# Altium PCB MCD V1.00 R.00.PcbDoc (part 1 of 3)
Units mm, origin at the board's own origin, x right, y up, seen from the top; angles counter-clockwise.
Board outline 257.5 x 162.5 mm, 2 copper layers (Top Layer, Bottom Layer); 260 components, 165 nets, 831 pads, 233 vias.
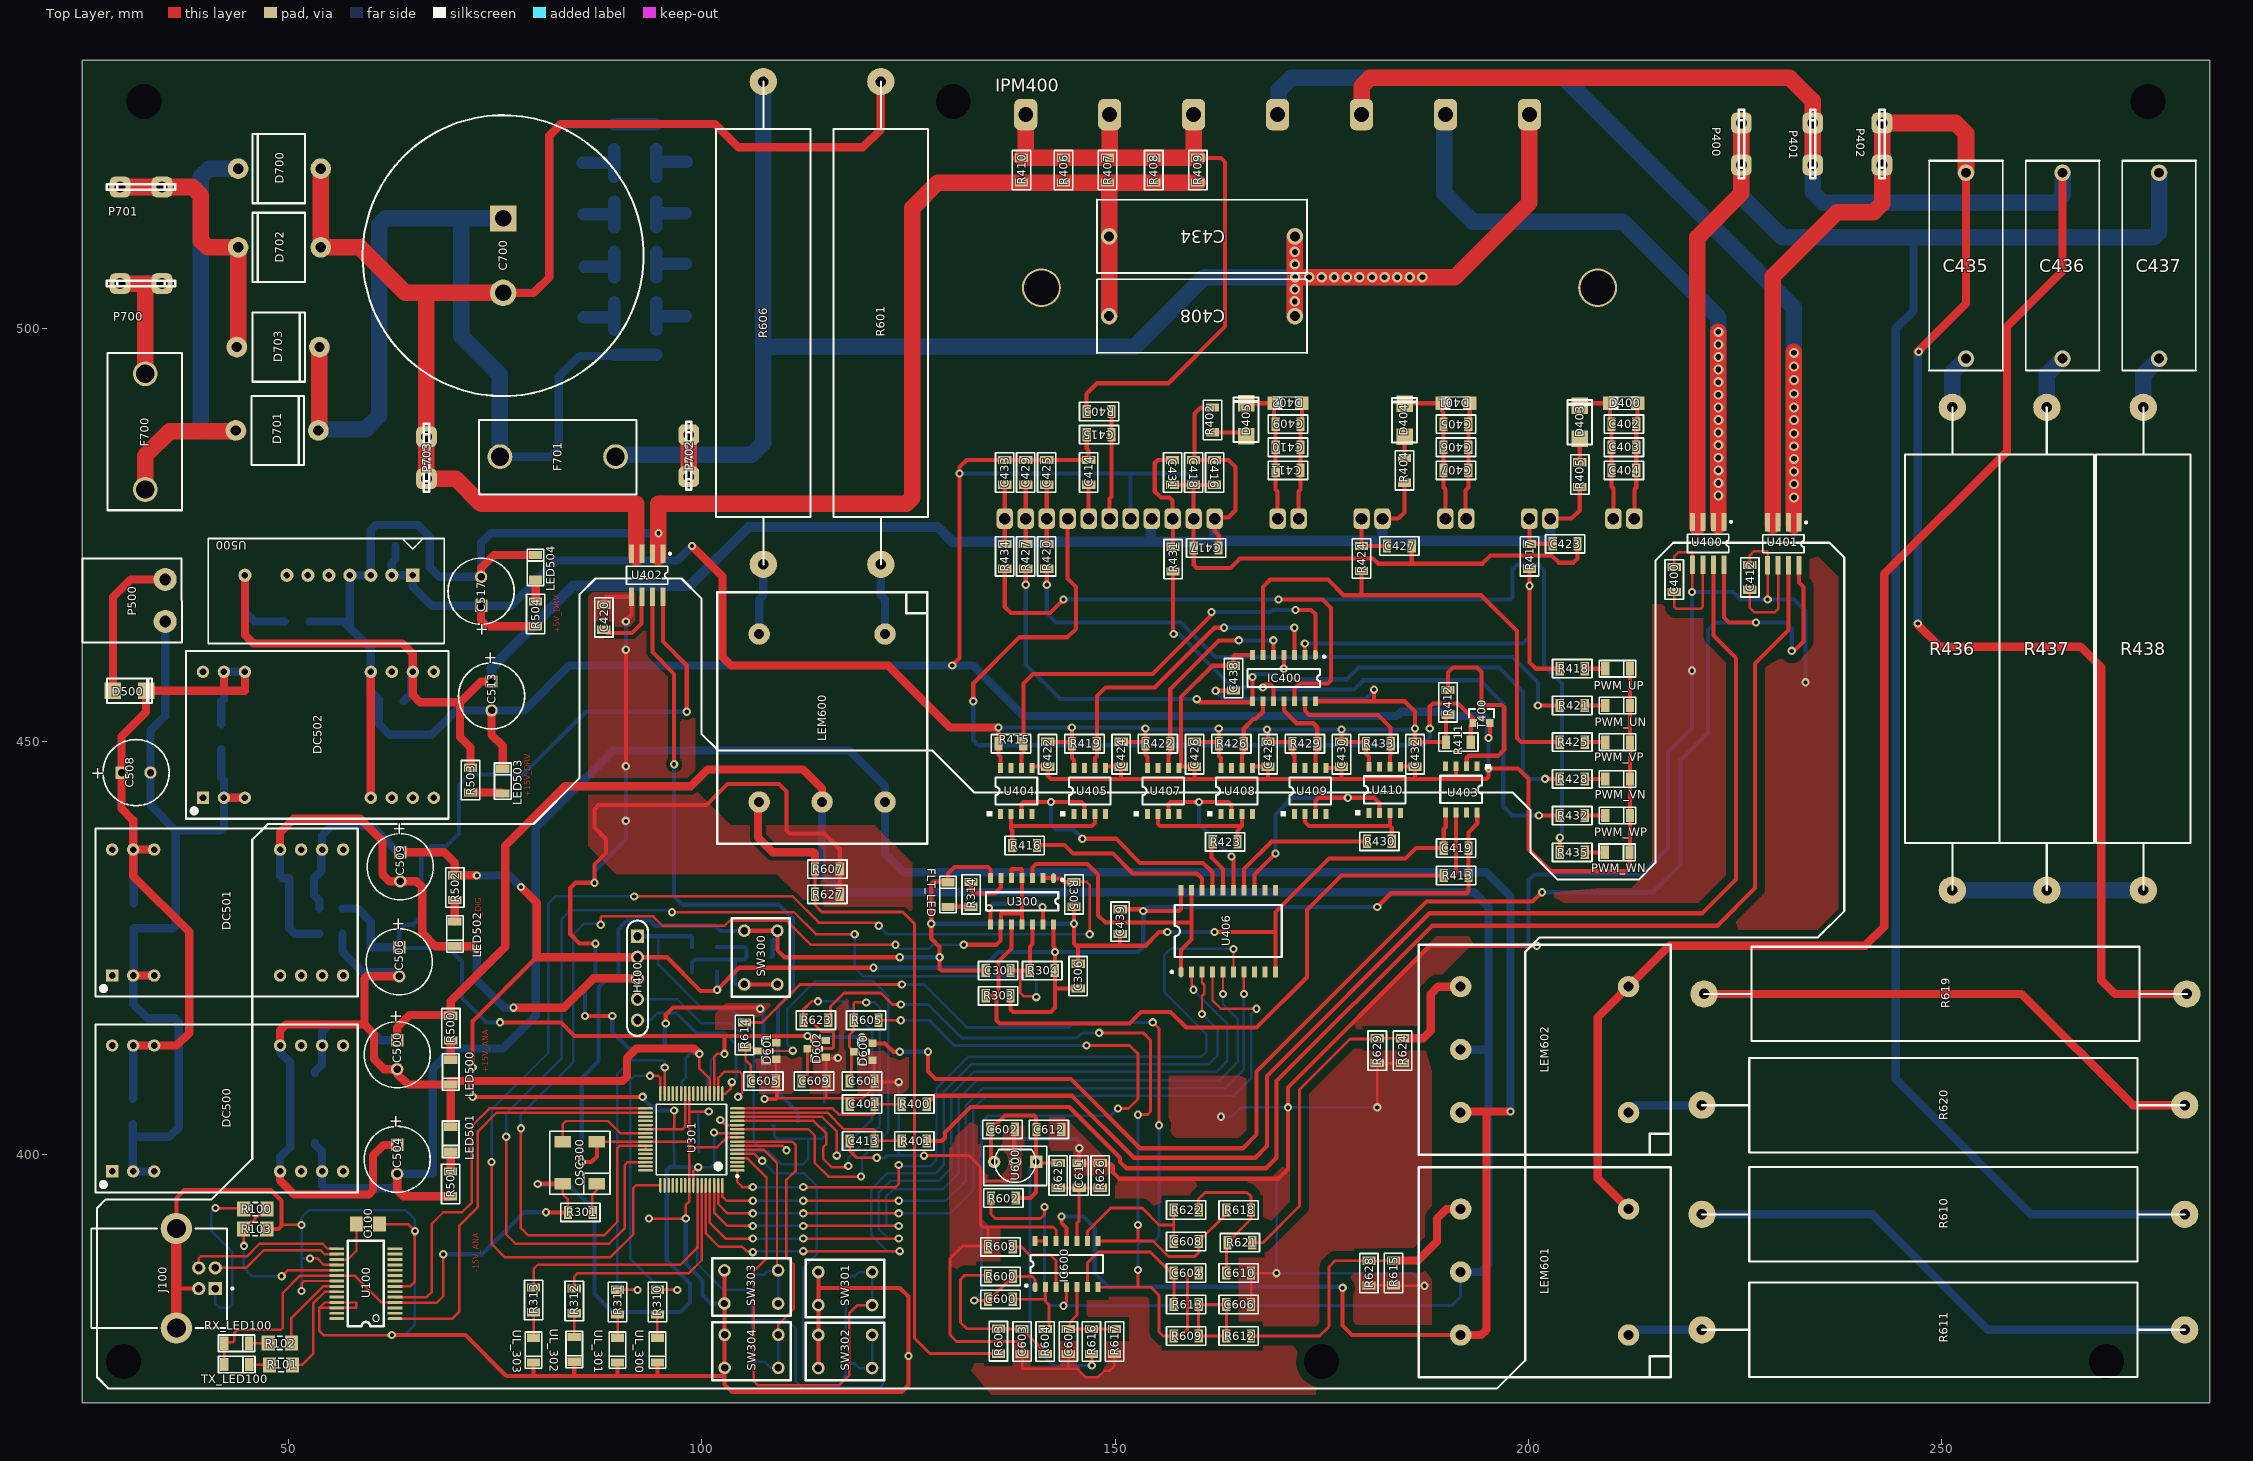
[diagram p0: Top Layer view]
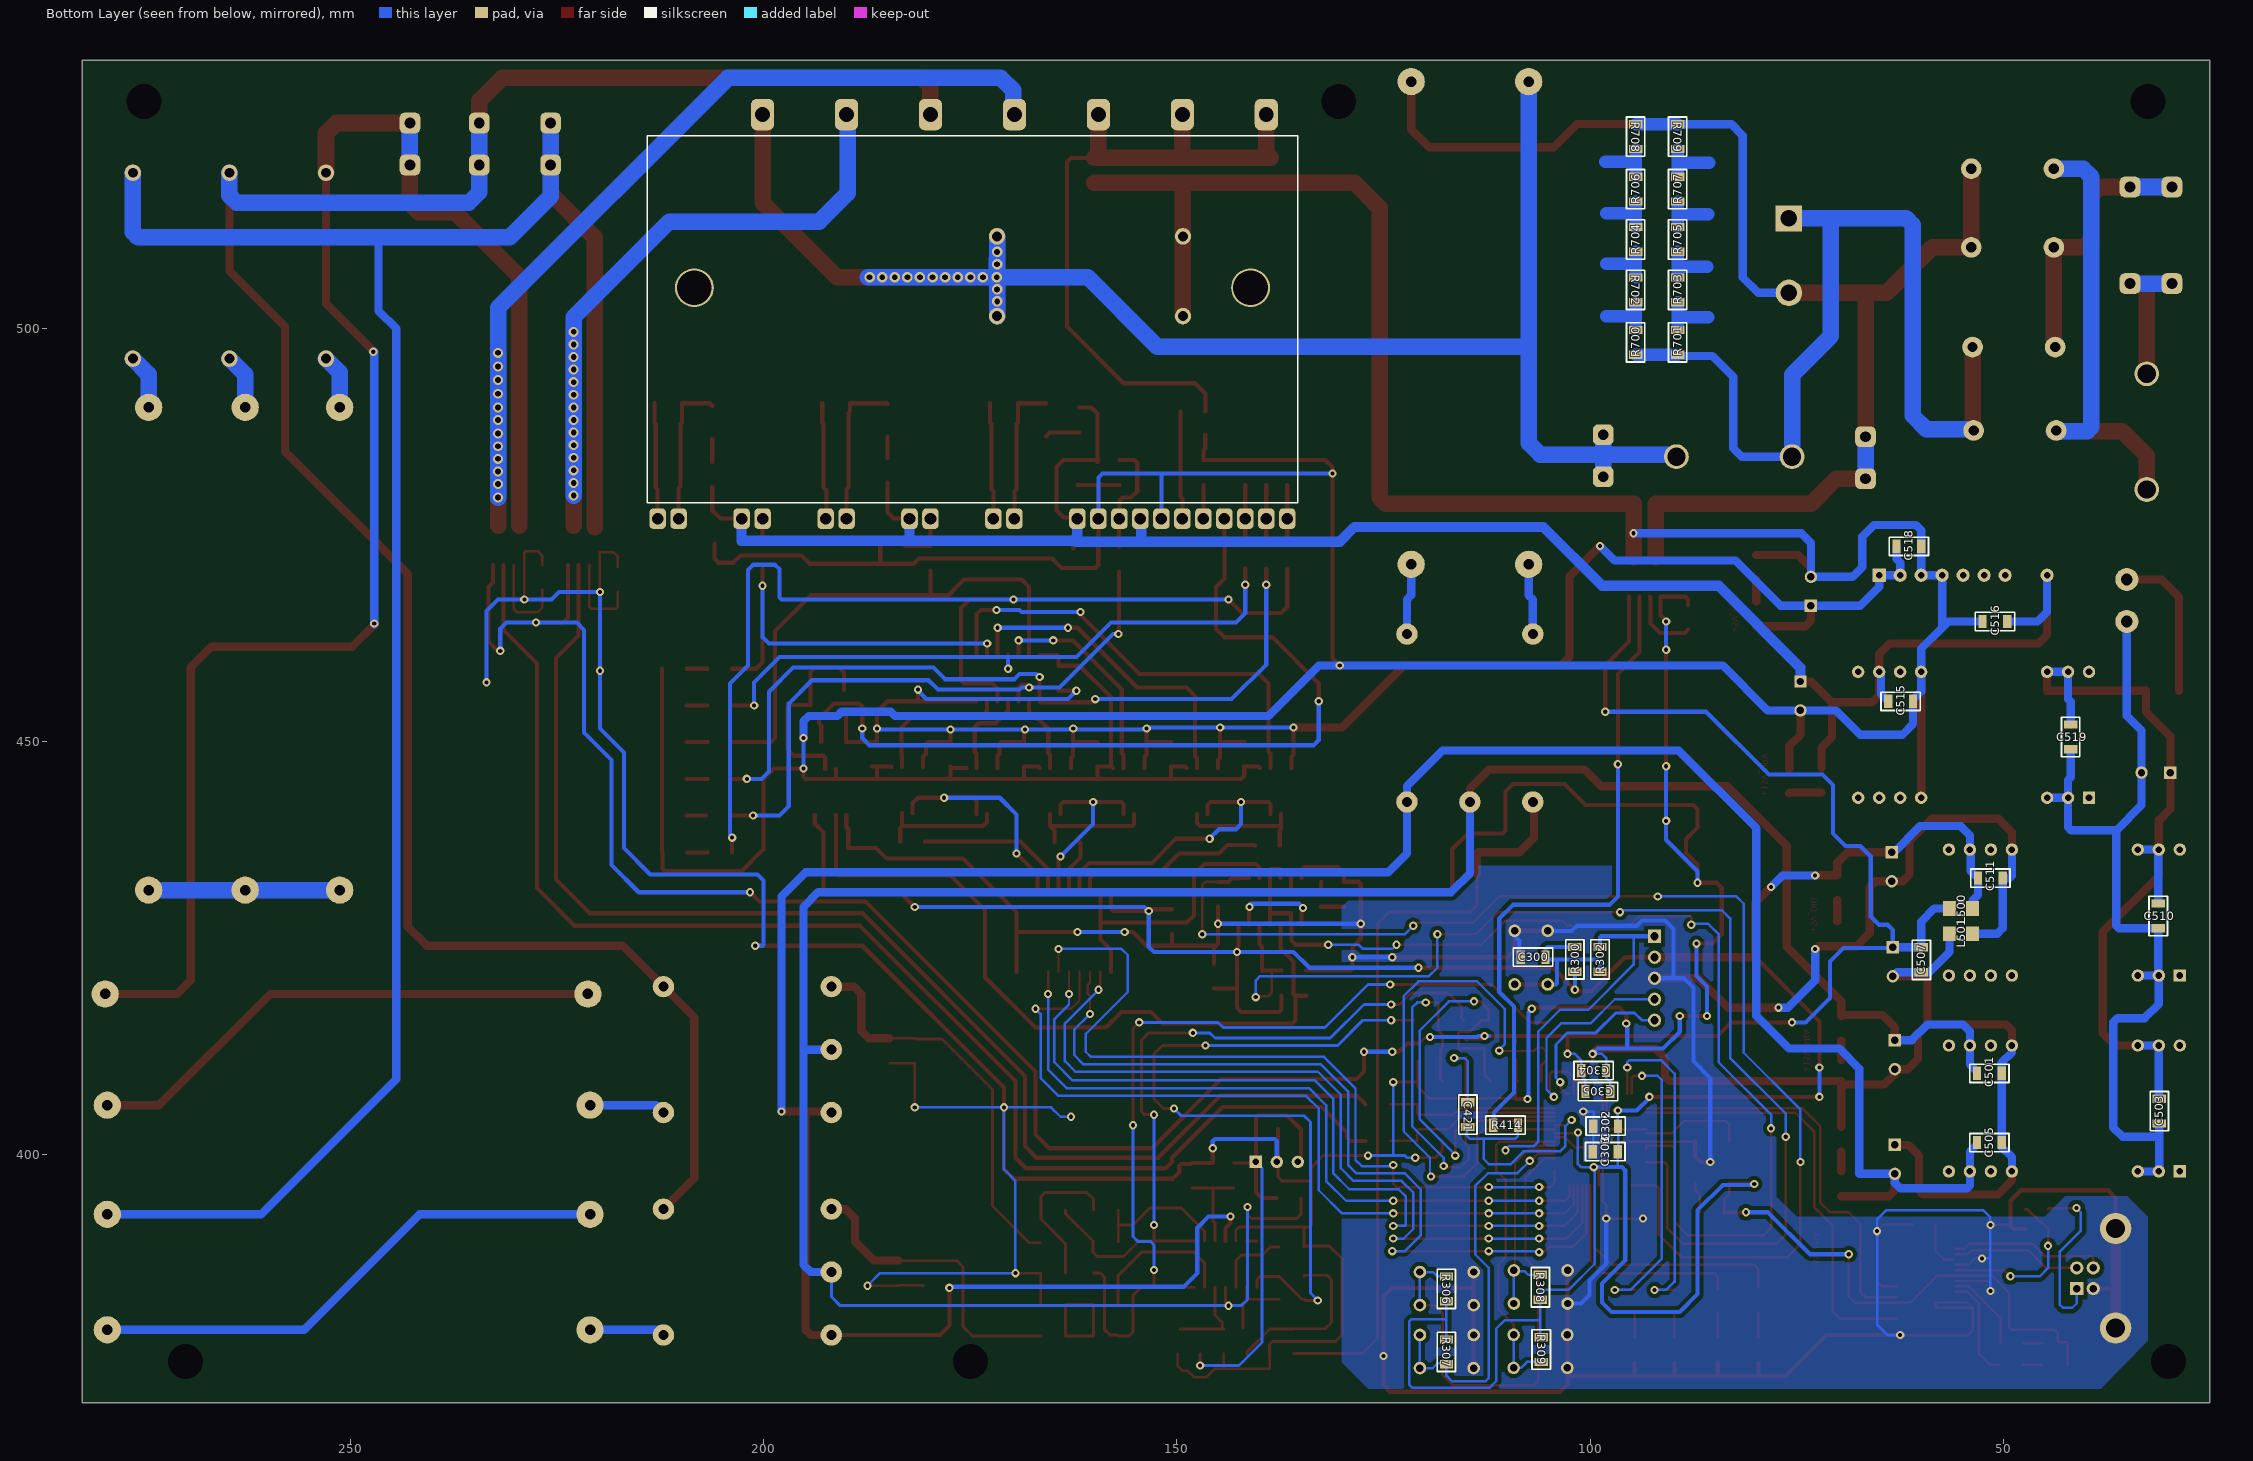
[diagram p1: Bottom Layer view, seen from below]

## Layer stack, top to bottom
Top Layer: signal copper 0.0356
Dielectric: dielectric 0.32, FR-4, Dk 4.8
Bottom Layer: signal copper 0.0356

## Board outline
282.5,370 25,370 25,532.5 282.5,532.5 282.5,370

## Design rules (kind name [scope] priority, off if disabled: settings)
Clearance Clearance_3 [InNamedPolygon('GND_DIG_POLY') vs Not(InNet(GND_DIG)) And  All] p1: gap=0.5
Clearance Clearance_2 [InNamedPolygon('GND_ANA_POLY_2') vs Not (InNet(GND_ANA)) And All] p2: gap=0.5
Clearance Clearance_1 [InNamedPolygon('GND_ANA_POUR') vs Not (InNet('GND_ANA')) And All] p3: gap=1
ComponentClearance [All] p1 off: gap=0 collisioncheckmode=3 verticalgap=0.254 showdistances=TRUE
HoleSize [All] p1: absolutevalues=TRUE maxlimit=5 minlimit=0.45 maxpercent=80.000 minpercent=20.000
PlaneConnect [All] p1: planeconnectstyle=Direct reliefexpansion=0.508 reliefentries=4 reliefconductorwidth=0.254 reliefairgap=0.254
PolygonConnect PolygonConnect_2 [All vs IsNamedPolygon('GND_ANA_POLY_2')] p1: connectstyle=Relief reliefconductorwidth=0.5 reliefentries=4 polygonreliefangle="90 Angle"
PolygonConnect PolygonConnect_1 [All vs IsNamedPolygon('GND_DIG_POLY') Or  IsNamedPolygon('GND_ANA_POLY')] p2: connectstyle=Direct reliefconductorwidth=0.5 reliefentries=4 polygonreliefangle="90 Angle"
PolygonConnect [All] p3: connectstyle=Direct reliefconductorwidth=0.5 reliefentries=4 polygonreliefangle="90 Angle"
RoutingVias [All] p1: holewidth=0.5 width=1 viastyle="Through Hole" minholewidth=0.4 minwidth=1 maxholewidth=1 maxwidth=3
SilkToSilkClearance [All] p1: silktosilkclearance=0
SilkscreenOverComponentPads [All] p1: minsilkscreentomaskgap=0.254
SolderMaskExpansion [All] p1: expansion=0.1
TestPointUsage [All] p1: valid=0 allowmultiple=FALSE
Testpoint [All] p1: side=15 testpointundercomponent=TRUE minsize=1.016 maxsize=2.54 preferedsize=1.524 minholesize=0 maxholesize=1.016 preferedholesize=0.813 testpointgrid=0.025 style=1023 order=0123456789
UnConnectedPin [Not All] p1:
Width [All] p1: maxlimit=4 minlimit=0.3 preferedwidth=0.5
19 further rules are at their usual default settings.

## Classes and differential pairs
component class VM: C600 C601 C602 C603 C604 C605 C606 C607 C608 C609 C610 C611 D600 D601 D602 IC600 LEM600 LEM601 LEM602 R600 R601 R602 R603 R604 R605 R606 R607 R608 R609 R610 R611 R612 R613 R614 R615 R616 R617 R618 R619 R620 R621 R622 R623 R624 R625 R626 R627 R628 R629 U600
component class REC: C700 D700 D701 D702 D703 F700 F701 P700 P701 P702 P703 R700 R701 R702 R703 R704 R705 R706 R707 R708 R709
component class PSU: C500 C501 C503 C504 C505 C506 C507 C508 C509 C510 C511 C513 C515 C516 C517 C518 C519 D500 DC500 DC501 DC502 L500 L501 LED500 LED501 LED502 LED503 LED504 P500 R500 R501 R502 R503 R504 U500
component class PB: C400 C401 C402 C403 C404 C405 C406 C407 C408 C409 C410 C411 C412 C413 C414 C415 C416 C417 C418 C419 C420 C421 C422 C423 C424 C425 C426 C427 C428 C429 C430 C431 C432 C433 C434 C435 C436 C437 C438 C439 D400 D401 D402 D403 D404 D405 IC400 IPM400 P400 P401 P402 PWM_UN PWM_UP PWM_VN PWM_VP PWM_WN PWM_WP R400 R401 R402 R403 R404 R405 R406 R407 R408 R409 R410 R411 R412 R413 R414 R415 R416 R417 R418 R419 R420 R421 R422 R423 R424 R425 R426 R427 R428 R429 R430 R431 R432 R433 R434 R435 R436 R437 R438 T400 U400 U401 U402 U403 U404 U405 U406 U407 U408 U409 U410
component class MCU: C300 C301 C302 C303 C304 C305 C306 FLT_LED H400 OSC300 R300 R301 R302 R303 R304 R305 R306 R307 R308 R309 R310 R311 R312 R313 R314 SW300 SW301 SW302 SW303 SW304 U300 U301 UL_300 UL_301 UL_302 UL_303
component class COM: C100 J100 R100 R101 R102 R103 RX_LED100 TX_LED100 U100

## Components (designator, comment, footprint, x,y, rotation, side; value= is the part's Value field where it differs from the comment)
C100 "Cap" 3216[1206] 59.606,391.637 r180 top
C300 "Cap 1206" 1206_REFLOW 106.913,423.938 r180 bottom
C301 "Cap 1206" 1206_REFLOW 135.86,422.313 r0 top
C302 "Cap 1206" 1206_REFLOW 98.125,403.485 r180 bottom
C303 "Cap 1206" 1206_REFLOW 98.171,400.399 r180 bottom
C304 "Cap 1206" 1206_REFLOW 99.568,410.21 r0 bottom
C305 "Cap 1206" 1206_REFLOW 99.06,407.67 r0 bottom
C306 "Cap 1206" 1206_REFLOW 145.542,421.64 r270 top
C400 "Cap 1206" 1206_REFLOW 217.678,469.646 r270 top
C401 "Cap 1206" 1206_REFLOW 119.404,406.146 r0 top
C402 "Cap 1206" 1206_REFLOW 211.582,488.442 r180 top
C403 "Cap 1206" 1206_REFLOW 211.582,485.648 r180 top
C404 "Cap 1206" 1206_REFLOW 211.582,482.854 r180 top
C405 "Cap 1206" 1206_REFLOW 191.262,488.442 r180 top
C406 "Cap 1206" 1206_REFLOW 191.262,485.648 r180 top
C407 "Cap 1206" 1206_REFLOW 191.262,482.854 r180 top
C408 "Cap" CAP26X19P22_5H 160.528,501.523 r0 top
C409 "Cap 1206" 1206_REFLOW 170.942,488.442 r180 top
C410 "Cap 1206" 1206_REFLOW 170.942,485.648 r180 top
C411 "Cap 1206" 1206_REFLOW 170.942,482.854 r180 top
C412 "Cap 1206" 1206_REFLOW 226.822,469.9 r270 top
C413 "Cap 1206" 1206_REFLOW 119.404,401.701 r0 top
C414 "Cap 1206" 1206_REFLOW 146.812,482.6 r270 top
C415 "Cap 1206" 1206_REFLOW 148.082,487.172 r0 top
C416 "Cap 1206" 1206_REFLOW 162.052,482.6 r90 top
C417 "Cap 1206" 1206_REFLOW 161.036,473.456 r0 top
C418 "Cap 1206" 1206_REFLOW 159.512,482.6 r90 top
C419 "Cap 1206" 1206_REFLOW 191.286,437.134 r0 top
C420 "Cap 1206" 1206_REFLOW 88.138,465.074 r270 top
C421 "Cap 1206" 1206_REFLOW 114.808,404.876 r270 bottom
C422 "Cap 1206" 1206_REFLOW 141.855,448.498 r90 top
C423 "Cap 1206" 1206_REFLOW 204.47,473.964 r180 top
C424 "Cap 1206" 1206_REFLOW 150.745,448.498 r90 top
C425 "Cap 1206" 1206_REFLOW 141.732,482.6 r270 top
C426 "Cap 1206" 1206_REFLOW 159.635,448.498 r90 top
C427 "Cap 1206" 1206_REFLOW 184.404,473.71 r180 top
C428 "Cap 1206" 1206_REFLOW 168.525,448.498 r90 top
C429 "Cap 1206" 1206_REFLOW 139.192,482.6 r270 top
C430 "Cap 1206" 1206_REFLOW 177.415,448.498 r90 top
C431 "Cap 1206" 1206_REFLOW 156.972,482.6 r90 top
C432 "Cap 1206" 1206_REFLOW 186.305,448.498 r90 top
C433 "Cap 1206" 1206_REFLOW 136.652,482.6 r270 top
C434 "Cap" CAP26X19P22_5H 160.528,511.175 r0 top
C435 "Cap" CAP26X19P22_5H 252.984,507.619 r90 top
C436 "Cap" CAP26X19P22_5H 264.668,507.619 r90 top
C437 "Cap" CAP26X19P22_5H 276.352,507.619 r90 top
C438 "Cap 1206" 1206_REFLOW 164.338,457.708 r270 top
C439 "Cap 1206" 1206_REFLOW 150.622,428.244 r90 top
C500 "Cap" CAPPR3.5-8x12 63.124,412.14 r270 top
C501 "Cap 1206" 1206_REFLOW 51.694,409.882 r0 bottom
C503 "Cap 1206" 1206_REFLOW 31.12,405.31 r90 bottom
C504 "Cap" CAPPR3.5-8x12 63.124,399.468 r270 top
C505 "Cap 1206" 1206_REFLOW 51.694,401.5 r180 bottom
C506 "Cap" CAPPR3.5-8x12 63.378,423.372 r270 top
C507 "Cap 1206" 1206_REFLOW 59.925,423.625 r90 bottom
C508 "Cap" CAPPR3.5-8x12 31.524,446.278 r0 top
C509 "Cap" CAPPR3.5-8x12 63.5,434.876 r270 top
C510 "Cap 1206" 1206_REFLOW 31.247,428.932 r90 bottom
C511 "Cap 1206" 1206_REFLOW 51.567,433.504 r0 bottom
C513 "Cap" CAPPR3.5-8x12 74.549,455.549 r270 top
C515 "Cap 1206" 1206_REFLOW 62.421,454.906 r0 bottom
C516 "Cap 1206" 1206_REFLOW 51.011,464.551 r180 bottom
C517 "Cap" CAPPR3.5-8x12 73.279,468.221 r90 top
C518 "Cap 1206" 1206_REFLOW 61.425,473.656 r0 bottom
C519 "Cap 1206" 1206_REFLOW 41.847,450.588 r90 bottom
C600 "Cap 1206" 1206_REFLOW 136.14,382.537 r180 top
C601 "Cap 1206" 1206_REFLOW 119.38,408.94 r180 top
C602 "Cap 1206" 1206_REFLOW 136.394,403.111 r180 top
C603 "Cap 1206" 1206_REFLOW 138.759,377.43 r90 top
C604 "Cap 1206" 1206_REFLOW 158.619,385.712 r0 top
C605 "Cap 1206" 1206_REFLOW 107.442,408.94 r180 top
C606 "Cap 1206" 1206_REFLOW 164.969,381.902 r180 top
C607 "Cap 1206" 1206_REFLOW 144.347,377.43 r90 top
C608 "Cap 1206" 1206_REFLOW 158.619,389.522 r0 top
C609 "Cap 1206" 1206_REFLOW 113.562,408.94 r180 top
C610 "Cap 1206" 1206_REFLOW 164.969,385.712 r180 top
C611 "Cap 1206" 1206_REFLOW 145.665,397.523 r270 top
C612 "Cap 1206" 1206_REFLOW 141.986,403.098 r180 top
C700 "Cap" "CAPR 52X35" 75.946,513.334 r270 top
D400 "BZV55CXXX" D_MINIMELF_BZV55C5V1(Primary) 211.582,490.982 r180 top
D401 "BZV55CXXX" D_MINIMELF_BZV55C5V1(Primary) 191.262,490.982 r180 top
D402 "BZV55CXXX" D_MINIMELF_BZV55C5V1(Primary) 170.942,490.982 r180 top
D403 "US1M" DO-214_S1A(Primary) 206.248,488.664 r90 top
D404 "S1A" DO-214_S1A(Primary) 185.039,488.918 r90 top
D405 "S1A" DO-214_S1A(Primary) 165.862,488.982 r90 top
D500 "1N5819" DO-214_S1A(Primary) 30.734,456.184 r0 top
D600 "BAT64-04" SOT23_HIS_Primary 120.65,411.48 r90 top
D601 "BAT64-04" SOT23_HIS_Primary 109.017,411.569 r90 top
D602 "BAT64-04" SOT23_HIS_Primary 114.986,411.823 r90 top
D700 "P 1000S" "P 1000 S" 53.879,519.363 r180 top
D701 "P 1000S" "P 1000 S" 43.594,487.68 r0 top
D702 "P 1000S" "P 1000 S" 53.879,509.838 r180 top
D703 "P 1000S" "P 1000 S" 43.719,497.773 r0 top
DC500 "TEN 5-2423" DIP24_TRACO 28.679,398.13 r90 top
DC501 "EC3A21HM" DIP24_TRACO 28.679,421.84 r90 top
DC502 "TEN 5-2423" DIP24_TRACO 39.664,443.35 r90 top
F700 "Fuse Holder PCB P15mm" "Fuse Holder PCB P15mm" 32.766,494.538 r270 top
F701 "Fuse Holder PCB P15mm" "Fuse Holder PCB P15mm" 75.565,484.632 r0 top
FLT_LED "RED LED" LED_1206 128.508,429.05 r90 top
H400 "HEADER X5" SIP5 92.202,426.466 r270 top
IC400 "SN74HC14D" SO14_HIS 174.244,460.314 r270 top
IC600 "LM837" SO14 140.335,383.999 r90 top
IPM400 "Component_1" PS22054 212.852,477.012 r180 top locked
J100 "1-1470156-1" USB2.5-2H4D 40.116,385.084 r180 top
L500 "RES" 3216[1206] 55.123,429.821 r0 bottom
L501 "RES" 3216[1206] 55.123,426.773 r0 bottom
LED500 "Green Led" LED_1206 70.903,412.505 r270 top
LED501 "Green Led" LED_1206 70.903,404.377 r270 top
LED502 "Green Led" LED_1206 71.395,429.221 r270 top
LED503 "Green Led" LED_1206 74.628,442.766 r90 top
LED504 "Green Led" LED_1206 78.597,468.643 r90 top
LEM600 "LEM" LV25 122.174,463.042 r0 top
LEM601 "LEM" LV25 212.149,378.211 r270 top
LEM602 "LEM" LV25 212.149,405.135 r270 top
OSC300 "ESC-3951M-80-BN" OSC7X5 85.072,399.067 r90 top
P400 "FASTON 6.3MM" "FASTON 6.3mm" 225.806,522.478 r270 top
P401 "FASTON 6.3MM" "FASTON 6.3mm" 234.442,522.478 r270 top
P402 "FASTON 6.3MM" "FASTON 6.3mm" 242.824,522.224 r90 top
P500 "MSTBA 2,5/ 2-G-5,08" MSTB2.5/2-G-5.08 35.052,469.646 r0 top
P700 "FASTON 6.3MM" "FASTON 6.3mm" 32.258,505.46 r180 top
P701 "FASTON 6.3MM" "FASTON 6.3mm" 32.258,517.144 r180 top
P702 "FASTON 6.3MM" "FASTON 6.3mm" 98.425,484.505 r90 top
P703 "FASTON 6.3MM" "FASTON 6.3mm" 66.675,484.505 r270 top
PWM_UN "LED" LED_1206 208.348,455.692 r0 top
PWM_UP "LED" LED_1206 208.348,460.137 r0 top
PWM_VN "LED" LED_1206 208.348,446.802 r0 top
PWM_VP "LED" LED_1206 208.348,451.247 r0 top
PWM_WN "LED" LED_1206 208.3,437.912 r0 top
PWM_WP "LED" LED_1206 208.348,442.357 r0 top
R100 "Resistor" 3216[1206] 45.974,393.446 r180 top
R101 "Resistor" 3216[1206] 49.065,374.587 r180 top
R102 "Resistor" 3216[1206] 48.938,377.254 r180 top
R103 "Resistor" 3216[1206] 45.939,391.04 r180 top
R300 "RES" 1206_REFLOW 101.854,423.672 r90 bottom
R301 "RES" 1206_REFLOW 85.293,393.053 r0 top
R302 "RES" 1206_REFLOW 98.806,423.672 r90 bottom
R303 "RES" 1206_REFLOW 135.86,419.265 r180 top
R304 "RES" 1206_REFLOW 141.194,422.313 r180 top
R305 "RES" 1206_REFLOW 145.034,431.546 r270 top
R306 "RES" 1206_REFLOW 117.399,383.804 r90 bottom
R307 "RES" 1206_REFLOW 117.399,376.184 r270 bottom
R308 "RES" 1206_REFLOW 106.032,383.994 r90 bottom
R309 "RES" 1206_REFLOW 105.918,376.452 r270 bottom
R310 "RES" 1206_REFLOW 94.624,382.206 r90 top
R311 "RES" 1206_REFLOW 89.798,382.206 r90 top
R312 "RES" 1206_REFLOW 84.559,382.333 r90 top
R313 "RES" 1206_REFLOW 79.638,382.46 r90 top
R314 "RES" 1206_REFLOW 132.588,431.546 r90 top
R400 "RES" 1206_REFLOW 125.706,406.146 r180 top
R401 "RES" 1206_REFLOW 125.706,401.701 r180 top
R402 "RES" 1206_REFLOW 161.798,488.95 r90 top
R403 "RES" 1206_REFLOW 148.082,489.966 r180 top
R404 "RES" 1206_REFLOW 185.039,482.854 r270 top
R405 "RES" 1206_REFLOW 206.248,482.346 r270 top
R406 "RES" 1206_REFLOW 143.764,519.176 r90 top
R407 "RES" 1206_REFLOW 149.098,519.176 r90 top
R408 "RES" 1206_REFLOW 154.686,519.176 r90 top
R409 "RES" 1206_REFLOW 160.02,519.176 r90 top
R410 "RES" 1206_REFLOW 138.684,519.176 r90 top
R411 "RES" 1206_REFLOW 191.557,449.96 r180 top
R412 "RES" 1206_REFLOW 190.287,454.786 r270 top
R413 "RES" 1206_REFLOW 191.286,433.832 r0 top
R414 "RES" 1206_REFLOW 110.236,403.606 r180 bottom
R415 "RES" 1206_REFLOW 137.41,449.768 r180 top
R416 "RES" 1206_REFLOW 139.061,437.449 r180 top
R417 "RES" 1206_REFLOW 200.152,472.44 r90 top
R418 "RES" 1206_REFLOW 205.335,458.851 r0 top
R419 "RES" 1206_REFLOW 146.3,449.768 r180 top
R420 "RES" 1206_REFLOW 141.732,472.44 r90 top
R421 "RES" 1206_REFLOW 205.335,454.406 r0 top
R422 "RES" 1206_REFLOW 155.19,449.768 r180 top
R423 "RES" 1206_REFLOW 163.322,437.896 r0 top
R424 "RES" 1206_REFLOW 179.832,472.186 r90 top
R425 "RES" 1206_REFLOW 205.335,449.961 r0 top
R426 "RES" 1206_REFLOW 164.08,449.768 r180 top
R427 "RES" 1206_REFLOW 139.192,472.44 r90 top
R428 "RES" 1206_REFLOW 205.335,445.516 r0 top
R429 "RES" 1206_REFLOW 172.97,449.768 r180 top
R430 "RES" 1206_REFLOW 181.987,437.957 r0 top
R431 "RES" 1206_REFLOW 157.032,472.103 r90 top
R432 "RES" 1206_REFLOW 205.335,441.071 r0 top
R433 "RES" 1206_REFLOW 181.86,449.768 r180 top
R434 "RES" 1206_REFLOW 136.652,472.44 r90 top
R435 "RES" 1206_REFLOW 205.335,436.626 r0 top
R436 "RES 10W" "RES 10W" 251.333,490.474 r0 top
R437 "RES 10W" "RES 10W" 262.763,490.474 r0 top
R438 "RES 10W" "RES 10W" 274.447,490.474 r0 top
R500 "RES" 1206_REFLOW 69.617,415.343 r90 top
R501 "RES" 1206_REFLOW 69.596,396.494 r270 top
R502 "RES" 1206_REFLOW 70.109,432.361 r270 top
R503 "RES" 1206_REFLOW 72.009,445.365 r270 top
R504 "RES" 1206_REFLOW 79.883,465.479 r90 top
R600 "RES" 1206_REFLOW 136.142,385.318 r0 top
R601 "RES 10W" "RES 10W" 121.661,471.478 r180 top
R602 "RES" 1206_REFLOW 136.487,394.788 r180 top
R603 "RES" 1206_REFLOW 135.886,377.457 r90 top
R604 "RES" 1206_REFLOW 141.553,377.43 r90 top
R605 "RES" 1206_REFLOW 119.888,416.306 r180 top
R606 "RES 10W" "RES 10W" 107.437,471.478 r180 top
R607 "RES" 1206_REFLOW 115.189,434.594 r0 top
R608 "RES" 1206_REFLOW 136.14,388.887 r180 top
R609 "RES" 1206_REFLOW 158.619,378.092 r180 top
R610 "RES 10W" "RES 10W" 221.034,392.816 r90 top
R611 "RES 10W" "RES 10W" 221.034,378.846 r90 top
R612 "RES" 1206_REFLOW 164.969,378.092 r180 top
R613 "RES" 1206_REFLOW 158.619,381.902 r180 top
R614 "RES" 1206_REFLOW 105.156,414.528 r270 top
R615 "RES" 1206_REFLOW 183.701,385.728 r270 top
R616 "RES" 1206_REFLOW 147.141,377.43 r90 top
R617 "RES" 1206_REFLOW 149.935,377.43 r90 top
R618 "RES" 1206_REFLOW 164.969,393.332 r180 top
R619 "RES 10W" "RES 10W" 221.288,419.486 r90 top
R620 "RES 10W" "RES 10W" 221.034,406.024 r90 top
R621 "RES" 1206_REFLOW 165.1,389.382 r180 top
R622 "RES" 1206_REFLOW 158.619,393.332 r180 top
R623 "RES" 1206_REFLOW 113.792,416.306 r180 top
R624 "RES" 1206_REFLOW 184.785,412.623 r270 top
R625 "RES" 1206_REFLOW 143.125,397.523 r270 top
R626 "RES" 1206_REFLOW 148.205,397.523 r270 top
R627 "RES" 1206_REFLOW 115.189,431.546 r0 top
R628 "RES" 1206_REFLOW 180.721,385.699 r270 top
R629 "RES" 1206_REFLOW 181.737,412.623 r270 top
R700 "RES" 1206_REFLOW 94.488,498.348 r90 bottom
R701 "RES" 1206_REFLOW 89.408,498.348 r90 bottom
R702 "RES" 1206_REFLOW 94.488,504.698 r90 bottom
R703 "RES" 1206_REFLOW 89.408,504.698 r90 bottom
R704 "RES" 1206_REFLOW 94.488,510.794 r90 bottom
R705 "RES" 1206_REFLOW 89.408,510.794 r90 bottom
R706 "RES" 1206_REFLOW 94.488,516.89 r90 bottom
R707 "RES" 1206_REFLOW 89.408,516.89 r90 bottom
R708 "RES" 1206_REFLOW 94.488,523.24 r90 bottom
R709 "RES" 1206_REFLOW 89.408,523.24 r90 bottom
RX_LED100 "GREEN LED" LED_1206 41.224,378.502 r0 top
SW300 "TS-061 (TS-1)" BUTTON 109.135,427.136 r180 top
SW301 "TS-061 (TS-1)" BUTTON 114.097,385.836 r270 top
SW302 "TS-061 (TS-1)" BUTTON 114.097,378.216 r270 top
SW303 "TS-061 (TS-1)" BUTTON 102.73,386.026 r270 top
SW304 "TS-061 (TS-1)" BUTTON 102.762,378.24 r270 top
T400 "MOSFET N SOT23" SOT23_HIS_Primary 193.335,452.269 r0 top
TX_LED100 "RED LED" LED_1206 41.24,375.936 r0 top
U100 "FT232RL" SSOP28 60.579,380.238 r180 top
U300 "CD74HCT132M" SO14 142.564,433.5 r270 top
U301 "DSPIC30F6015T-30I/PT" TQFP-PT64_N 98.734,401.878 r180 top locked
U400 "ACS714" SO8 221.787,474.021 r180 top
U401 "ACS714" SO8 230.886,473.964 r180 top
U402 "ACS713" SO8 93.377,470.159 r180 top
U403 "6N137" SO8_HIS 191.897,444.24 r270 top
U404 "6N137" SO8_HIS 138.045,444.053 r90 top
U405 "6N137" SO8_HIS 146.935,444.053 r90 top
U406 "74HC541" SOL20 157.988,422.403 r90 top
U407 "6N137" SO8_HIS 155.825,444.053 r90 top
U408 "6N137" SO8_HIS 164.715,444.053 r90 top
U409 "6N137" SO8_HIS 173.605,444.053 r90 top
U410 "6N137" SO8_HIS 182.622,444.18 r90 top
U500 "DC DC ROHM" BP5220 54.577,464.478 r180 top
U600 "TL431CLP" "TO-92 - TL431" 137.92,399.161 r270 top
UL_300 "YELLOW LED" LED_1206 95.91,378.86 r270 top
UL_301 "YELLOW LED" LED_1206 91.084,378.86 r270 top
UL_302 "YELLOW LED" LED_1206 85.845,378.939 r270 top
UL_303 "YELLOW LED" LED_1206 80.924,378.86 r270 top

## Footprints (in the part's own frame and the unit in brackets; to place one, negate y for a bottom-side part, rotate by r counter-clockwise, add the part's x,y. Pads: shape width x height; smd on the part's side, far side on the other; paste and mask are expansions set on the pad)
1206_REFLOW [mm]
  rect 1x1.6 smd: 1(-1.5,0) 2(1.5,0)
  silkscreen extent -2.38,-1.11 2.38,1.11
3216[1206] [mm] "Chip Resistor; Body 3.2 x 1.6 mm (LxW typ)"
  rect 1.6x1.8 smd: 1(-1.4,0) 2(1.4,0)
  silkscreen extent -0.3,-0.8 0.3,0.8
BP5220 [mm]
  rect 1.6x1.6 hole 0.8: 1(-10.447,-5.676)
  round 1.6 hole 0.8: 2(-7.907,-5.676) 3(-5.367,-5.676) 4(-2.827,-5.676) 5(-0.287,-5.676) 6(2.253,-5.676) 7(4.793,-5.676) 9(9.873,-5.676)
  silkscreen extent -14.26,-10.12 14.32,2.58
BUTTON [mm]
  round 1.524 hole 0.9: 1(0,0) 1(4,0) 2(0,6.5) 2(4,6.5)
  silkscreen extent -1.5,-1.5 5.5,8
CAP26X19P22_5H [mm]
  round 2 hole 1.2: 1(-11.25,0) 2(11.25,0)
  silkscreen extent -12.7,-4.44 12.7,4.44
CAPPR3.5-8x12 [mm] "Capacitor, Electrolytic, Radial; Body 8 x 12 mm (Dia.xH typ); Pin Spacing 3.5 mm (typ)"
  rect 1.5x1.5 hole 0.9: 1(-1.75,0)
  round 1.5 hole 0.9: 2(1.75,0)
  silkscreen extent -4,-4 4,4
"CAPR 52X35" [mm]
  rect 3.2x3.2 hole 2: 1(0,0)
  round 3.2 hole 2: 2(9,0)
  silkscreen extent -12.5,-17 21.5,17
D_MINIMELF_BZV55C5V1(Primary) [mm]
  rect 1.6x1.6 smd: A(-1.67,0) K(1.7,0)
  silkscreen extent -1.72,-0.76 1.73,0.76
DIP24_TRACO [mm]
  rect 1.5x1.5 hole 0.8: 1(-0.12,0.04)
  round 1.5 hole 0.8: 2(-0.12,-2.5) 3(-0.12,-5.04) 5(-0.12,-22.82) 7(-0.12,-27.9) 8(15.12,-27.9) 9(-0.12,-20.28) 10(15.12,-22.82) 11(-0.12,-25.36) 14(15.12,-25.36) 16(15.12,-20.28) 22(15.12,-5.04) 23(15.12,-2.5) 24(15.12,0.04)
  silkscreen extent -2.66,-29.68 17.66,2.07
DO-214_S1A(Primary) [mm]
  rect 2x2 smd: A(-2,0) K(2,0)
  silkscreen extent -2.7,-1.5 2.75,1.5
"FASTON 6.3mm" [mm]
  rrect50% 2.5x2.5 hole 1.3: 1(-2.413,0) 2(2.667,0)
  silkscreen extent -4,-0.32 4.25,0.32
"Fuse Holder PCB P15mm" [mm]
  round 3 hole 2.2: 1(0,-0.127) 2(14,-0.127)
  silkscreen extent -2.54,-4.72 16.51,4.3
LED_1206 [mm]
  rect 1x1.6 smd paste-25.4: A(0.972,-1.286) K(3.972,-1.286)
  silkscreen extent 0.27,-2.29 4.67,-0.29
LV25 [mil]
  round 102 hole 47: 1(0,0) 2(-600,0) 3(-600,-800) 4(-300,-800) 5(0,-800)
  silkscreen extent -800,-1000 200,200
MSTB2.5/2-G-5.08 [mm]
  round 2.8 hole 1.4: 1(0,0) 2(0,-5.08)
  silkscreen extent -10.01,-7.64 2.01,2.54
OSC7X5 [mm]
  rect 1.4x2 smd: 1(-2.54,-2.222) 2(2.54,-2.222) 3(2.54,1.905) 4(-2.54,1.905)
  silkscreen extent -3.81,-3.81 3.81,3.49
"P 1000 S" [mm] "1200V Rectifier Diode"
  round 2.5 hole 1.25: A(0,0) K(10,0)
  silkscreen extent 1.9,-4.19 8.25,4.19
PS22054 [mm]
  rrect50% 2x2.5 hole 1.4: 1(0,0) 2(2.54,0) 3(10.16,0) 4(12.7,0) 5(20.32,0) 6(22.86,0) 7(30.48,0) 8(33.02,0) 9(40.64,0) 10(43.18,0) 11(50.8,0) 12(53.34,0) 13(55.88,0) 14(58.42,0) 15(60.96,0) 16(63.5,0) 17(66.04,0) 18(68.58,0) 19(71.12,0) 20(73.66,0) 21(76.2,0)
  rrect50% 2.8x3.8 hole 1.8: 22(12.7,-48.895) 23(22.86,-48.895) 24(33.02,-48.895) 25(43.18,-48.895) 26(53.34,-48.895) 27(63.5,-48.895) 28(73.66,-48.895)
  round 4.7 hole 4.2: 29(4.445,-27.94) 30(71.755,-27.94)
"RES 10W" [mil]
  round 130 hole 50: 1(0,0) 2(0,-2300)
  silkscreen extent -225,-2300 225,0
SIP5 [mm]
  rect 1.6x1.6 hole 1: 1(0,0)
  round 1.6 hole 1: 2(2.54,0) 3(5.08,0) 4(7.62,0) 5(10.16,0)
  silkscreen extent -1.9,-1.27 12.06,1.27
SO8 [mm] "Small Outline; 8 Leads; Body Width 3.9 mm; Pitch 1.27 mm"
  rect 0.6x2.2 smd: 1(-1.905,-2.6) 2(-0.635,-2.6) 3(0.635,-2.6) 4(1.905,-2.6) 5(1.905,2.6) 6(0.635,2.6) 7(-0.635,2.6) 8(-1.905,2.6)
  silkscreen extent -2.88,-2.72 2.5,1.1
SO8_HIS [mm]
  rect 1.2x0.6 smd: 1(-2.8,1.905) 2(-2.8,0.635) 3(-2.8,-0.635) 4(-2.8,-1.905) 5(2.8,-1.905) 6(2.8,-0.635) 7(2.8,0.635) 8(2.8,1.905)
  silkscreen extent -3.08,-2.54 1.65,3.56
SO14 [mm]
  oval 1.2x0.6 smd: 1(0,0)
  rect 1.2x0.6 smd: 2(0,-1.27) 3(0,-2.54) 4(0,-3.81) 5(0,-5.08) 6(0,-6.35) 7(0,-7.62) 8(5.6,-7.62) 9(5.6,-6.35) 10(5.6,-5.08) 11(5.6,-3.81) 12(5.6,-2.54) 13(5.6,-1.27) 14(5.6,0)
  silkscreen extent 0.05,-8.19 3.9,1.22
SO14_HIS [mm]
  oval 1.2x0.6 smd: 1(-0.2,0)
  rect 1.2x0.6 smd: 2(-0.2,-1.27) 3(-0.2,-2.54) 4(-0.2,-3.81) 5(-0.2,-5.08) 6(-0.2,-6.35) 7(-0.2,-7.62) 8(5.4,-7.62) 9(5.4,-6.35) 10(5.4,-5.08) 11(5.4,-3.81) 12(5.4,-2.54) 13(5.4,-1.27) 14(5.4,0)
  silkscreen extent -0.15,-8.19 3.7,1.23
SOL20 [mm]
  oval 1.3x0.6 smd: 1(-0.255,0)
  rect 1.3x0.6 smd: 2(-0.255,-1.27) 3(-0.255,-2.54) 4(-0.255,-3.81) 5(-0.255,-5.08) 6(-0.255,-6.35) 7(-0.255,-7.62) 8(-0.255,-8.89) 9(-0.255,-10.16) 10(-0.255,-11.43) 11(9.645,-11.43) 12(9.645,-10.16) 13(9.645,-8.89) 14(9.645,-7.62) 15(9.645,-6.35) 16(9.645,-5.08) 17(9.645,-3.81) 18(9.645,-2.54) 19(9.645,-1.27) 20(9.645,0)
  silkscreen extent -0.4,-12.19 7.84,1.25
SOT23_HIS_Primary [mm]
  rect 0.9x1 smd: 1(0,0) 2(2.032,0) 3(1.016,2.21)
  silkscreen extent -0.51,0.46 2.54,1.73
SSOP28 [mm]
  oval 1.8x0.35 smd: 1(-2.29,0.039)
  rect 1.8x0.35 smd: 2(-2.29,-0.611) 3(-2.29,-1.261) 4(-2.29,-1.911) 5(-2.29,-2.561) 6(-2.29,-3.211) 7(-2.29,-3.861) 8(-2.29,-4.511) 9(-2.29,-5.161) 10(-2.29,-5.811) 11(-2.29,-6.461) 12(-2.29,-7.111) 13(-2.29,-7.761) 14(-2.29,-8.411) 15(4.76,-8.411) 16(4.76,-7.761) 17(4.76,-7.111) 18(4.76,-6.461) 19(4.76,-5.811) 20(4.76,-5.161) 21(4.76,-4.511) 22(4.76,-3.861) 23(4.76,-3.211) 24(4.76,-2.561) 25(4.76,-1.911) 26(4.76,-1.261) 27(4.76,-0.611) 28(4.76,0.039)
  silkscreen extent -0.94,-9.36 3.41,0.99
"TO-92 - TL431" [mm]
  rect 1.5x1.5 hole 0.8: 1(0,2.54)
  round 1.5 hole 0.8: 2(0,0) 3(0,-2.54)
  silkscreen extent -1.91,-3.81 2.86,3.81
TQFP-PT64_N [mm] "Thin QFP, 64-Leads, Body 10x10mm, Pitch 0.5mm, IPC Medium Density"
  oval 1.8x0.3 smd: 1(-5.55,3.75) 2(-5.55,3.25) 3(-5.55,2.75) 4(-5.55,2.25) 5(-5.55,1.75) 6(-5.55,1.25) 7(-5.55,0.75) 8(-5.55,0.25) 9(-5.55,-0.25) 10(-5.55,-0.75) 11(-5.55,-1.25) 12(-5.55,-1.75) 13(-5.55,-2.25) 14(-5.55,-2.75) 15(-5.55,-3.25) 16(-5.55,-3.75) 33(5.55,-3.75) 34(5.55,-3.25) 35(5.55,-2.75) 36(5.55,-2.25) 37(5.55,-1.75) 38(5.55,-1.25) 39(5.55,-0.75) 40(5.55,-0.25) 41(5.55,0.25) 42(5.55,0.75) 43(5.55,1.25) 44(5.55,1.75) 45(5.55,2.25) 46(5.55,2.75) 47(5.55,3.25) 48(5.55,3.75)
  oval 0.3x1.8 smd: 17(-3.75,-5.55) 18(-3.25,-5.55) 19(-2.75,-5.55) 20(-2.25,-5.55) 21(-1.75,-5.55) 22(-1.25,-5.55) 23(-0.75,-5.55) 24(-0.25,-5.55) 25(0.25,-5.55) 26(0.75,-5.55) 27(1.25,-5.55) 28(1.75,-5.55) 29(2.25,-5.55) 30(2.75,-5.55) 31(3.25,-5.55) 32(3.75,-5.55) 49(3.75,5.55) 50(3.25,5.55) 51(2.75,5.55) 52(2.25,5.55) 53(1.75,5.55) 54(1.25,5.55) 55(0.75,5.55) 56(0.25,5.55) 57(-0.25,5.55) 58(-0.75,5.55) 59(-1.25,5.55) 60(-1.75,5.55) 61(-2.25,5.55) 62(-2.75,5.55) 63(-3.25,5.55) 64(-3.75,5.55)
  silkscreen extent -5.68,-4.25 4.25,4.57, body extent -5,-5 5,5, height 1.2
USB2.5-2H4D [mm] "Connector; USB1.1, Type B, Thru-Hole; 4 Position; Right Angle"
  rect 1.6x1.6 hole 0.92: 1(-1,1.25)
  round 1.6 hole 0.92: 2(-1,-1.25) 3(1,-1.25) 4(1,1.25)
  round 3.8 hole 2.3: 5(3.71,6.02) 6(3.71,-6.02)
  silkscreen extent -3.18,-6.02 13.99,6.02, body extent -2.41,-6.02 13.99,6.02, height 11.1

## Part data
C500 C504 C506 C508 C509 C513 C517 C700: library part "Cap pol"
D400 D401 D402: "Zener Diode"
D403: library part S1A, "S1A"
D600 D601 D602: "Silicon Schottky Diodes"
DC501: "DC/DC CONVERTER, 3W 5V"
FLT_LED LED500 LED501 LED502 LED503 LED504 RX_LED100 TX_LED100 UL_300 UL_301 UL_302 UL_303: library part LED
IC400: "Hex Schmitt-Trigger INVERTERS"
J100: "USB 1.1, Right Angle, Thru-Hole, B Type, Receptacle, 4 Position, White"
L500 L501 R300 R301 R302 R303 R304 R305 R306 R307 R308 R309 R310 R311 R312 R313 R314 R400 R401 R402 R403 R404 R405 R406 R407 R408 R409 R410 R411 R412 R413 R414 R415 R416 R417 R418 R419 R420 R421 R422 R423 R424 R425 R426 R427 R428 R429 R430 R431 R432 R433 R434 R435 R500 R501 R502 R503 R504 R600 R602 R603 R604 R605 R607 R608 R609 R612 R613 R614 R615 R616 R617 R618 R621 R622 R623 R624 R625 R626 R627 R628 R629 R700 R701 R702 R703 R704 R705 R706 R707 R708 R709: library part "RES 1"
LEM600 LEM601 LEM602: "LV25-P"
OSC300: "ESC-3951M-80-BN 8Mhz"
P500: "Header, right angled, 12 A, 250 V, pitch 5.08 mm, No. of poles:2"
R100 R101 R102 R103: library part RES1
SW300 SW301 SW302 SW303 SW304: "BUTTON"
U301: "High-Performance 16-bit Digital Signal Controller, 144 KB Flash, 8 KB SRAM, 4 KB EEPROM, 64-Pin TQFP, Industrial Temperature, Tape and Reel"
U403 U404 U405 U407 U408 U409 U410: "Single Optocoupler"
U500: library part BP5220

## Free pads (board coordinates)
  round 4 hole 4.2 unplated: 0(30,375) 0(32.5,527.5) 0(130.429,527.5) 0(175,375) 0(270,375) 0(275,527.5)

## Via types
v1: diameter 1, hole 0.5, Top Layer to Bottom Layer, 192 vias
v2: diameter 1.2, hole 0.7, Top Layer to Bottom Layer, 26 vias
v3: diameter 1.27, hole 0.711, Top Layer to Bottom Layer, 15 vias

## Nets (pads, with @x,y where several pads share a name; then routed paths per layer and width w, separated by ;. In a path a pad name is that pad's centre, name@x,y a point inside that pad or via, vN(x,y) a via of type N, cw(c..) or ccw(c..) an arc to the next point about the centre after c; other vN are vias at no path point)
+5V_ANA: C304.2 C305.2 C506.1 C507.2 D600.2 D601.2 D602.2 L500.2 U301.19 U400.8 U401.8 U402.8 | length 352.7
  Top Layer w0.3: U301.19@101.484,407.428 101.484,411.872 101.854,412.242 v1(102.743,412.242) ; 108.966,414.401 109.017,414.35 D601.2@109.017,413.601 D601.2@109.271,413.855 ; v1(112.776,414.401) 113.157,414.02 114.821,414.02 D602.2@114.986,413.855 D602.2@115.278,414.147 ; v1(119.38,414.274) 119.888,414.274 D600.2@120.65,413.512
  Top Layer w0.5: v1(75.565,416.052) 82.931,416.052 84.582,414.401 102.743,414.401 ; U402.8@95.282,467.559 95.282,462.121 98.171,459.232 v1(98.171,453.644) ; v1(102.743,412.242) 102.743,414.401 ; v1(112.776,414.401) 108.966,414.401 102.743,414.401 ; D600.2@120.65,413.512 122.174,413.512 123.19,412.496 v1(123.952,412.496) ; v1(127.381,412.496) 127.381,410.083 128.27,409.194 144.653,409.194 153.035,400.812 165.481,400.812 167.132,402.463 167.132,410.083 187.706,430.657 200.533,430.657 v1(201.676,431.8) ; U400.8@223.692,471.421 223.692,465.029 224.282,464.439 v1(227.584,464.439) ; v1(231.902,461.01) 232.156,461.01 233.299,462.153 233.299,468.757 232.791,469.265 U401.8@232.791,471.364
  Bottom Layer w0.3: C305.2@100.457,407.543 100.584,407.67 100.584,409.067 101.068,409.551 C304.2@101.068,410.21 101.068,411.456 101.854,412.242 v1(102.743,412.242)
  Bottom Layer w0.5: v1(75.565,416.052) 73.914,416.052 70.993,418.973 70.993,423.418 69.342,425.069 63.431,425.069 C506.1@63.378,425.122 63.375,425.125 63.375,427.23 64.008,427.863 65.024,427.863 66.04,428.879 66.04,436.118 67.31,437.388 69.088,437.388 70.612,438.912 70.612,444.754 71.882,446.024 78.359,446.024 85.979,453.644 v1(98.171,453.644) ; 112.268,414.401 v1(112.776,414.401) 113.538,414.401 113.665,414.274 v1(119.38,414.274) ; v1(123.952,412.496) v1(127.381,412.496) ; v1(201.676,431.8) 215.138,431.8 218.44,435.102 218.44,447.802 221.742,451.104 221.742,463.55 222.631,464.439 v1(227.584,464.439) 231.14,464.439 231.902,463.677 v1@231.902,461.264
  Bottom Layer w1: L500.2@56.523,429.821 58.367,429.821 59.925,428.263 C507.2@59.925,425.125 C506.1@63.375,425.125
+5V_DIG: C302.2 C303.2 C306.2 C419.2 C439.2 C509.1 C511.2 DC501.14 H400.2 L500.1 OSC300.4 R300.1 R301.1 R303.1 R304.1 R306.1 R307.1 R308.1 R309.1 R413.2 R502.1 RX_LED100.A TX_LED100.A U100.4 U100.20 U300.14 U301.10 U301.26 U301.38 U301.57 U403.8 U406.20 | length 470.2
  Top Layer w0.3: TX_LED100.A@42.212,374.65 42.212,377.2 RX_LED100.A@42.196,377.216 42.297,377.317 43.18,377.317 43.434,377.571 43.434,378.46 43.815,378.841 49.022,378.841 49.276,379.095 49.276,383.286 51.389,385.399 U100.20@55.819,385.399 57.958,385.399 61.208,382.149 U100.4@62.869,382.149 62.875,382.143 67.945,382.143 68.707,382.905 v1(68.707,387.985) ; OSC300.4@83.167,396.527 83.167,395.242 83.793,394.616 R301.1@83.793,393.053 ; U301.38@93.184,403.128 96.647,403.128 ; v1(96.647,405.384) 96.647,403.128 ; U301.26@97.984,407.428 97.984,403.419 97.693,403.128 96.647,403.128 ; U301.57@98.984,396.328 98.984,398.069 99.441,398.526 v1(99.568,398.526) ; v1(101.473,402.717) 101.562,402.628 U301.10@104.284,402.628
  Top Layer w0.5: v1(72.263,407.035) v1(92.837,407.035) ; v1(72.263,410.591) 72.263,416.179 80.01,423.926 ; v1(80.137,396.494) 80.17,396.527 OSC300.4@83.167,396.527 ; v1(81.153,393.065) 81.165,393.053 R301.1@83.793,393.053 ; H400.2@92.202,423.926 95.758,423.926 99.822,419.862 101.981,419.862 v1(101.854,419.989) 104.521,422.656 v1(120.777,422.656) ; R303.1@137.36,419.265 137.36,417.63 137.668,417.322 142.24,417.322 142.748,417.83 142.748,419.989 ; U300.14@142.564,427.9 142.564,425.253 142.748,425.069 v1(142.748,424.561) R304.1@142.748,422.021 ; R304.1@142.748,422.367 R304.1@142.694,422.313 142.748,422.259 142.748,419.989 ; C306.2@145.542,420.14 142.899,420.14 142.748,419.989 ; C439.2@150.622,429.744 153.186,429.744 v1(153.416,429.514) 157.734,429.514 157.988,429.768 U406.20@157.988,432.048 ; v1(181.737,430.022) 183.388,431.673 192.532,431.673 192.786,431.927 R413.2@192.786,433.832 C419.2@192.786,437.134 192.786,439.039 193.838,440.091 U403.8@193.838,441.127
  Top Layer w1: C509.1@63.5,436.626 68.834,436.626 70.109,435.351 R502.1@70.109,433.861 72.742,433.861 v1(72.771,433.832) ; v1(78.105,432.435) 80.01,430.53 80.01,423.926 H400.2@92.202,423.926
  Bottom Layer w0.3: v1(96.647,405.384) 96.647,403.507 C302.2@96.625,403.485 96.625,400.445 C303.2@96.671,400.399 96.671,398.629 ; v1@99.441,398.526 101.092,398.526 101.473,398.907 v1(101.473,402.717) ; v1(99.568,398.526) 99.441,398.399 99.441,386.842 102.616,383.667 105.791,383.667 106.045,383.413 106.045,382.507 R308.1@106.032,382.494 106.032,379.984 ; R309.1@106.064,377.962 106.032,377.994 106.032,379.984 ; R307.1@117.399,377.684 117.399,379.984 ; R306.1@117.399,382.304 117.399,379.984 ; 106.032,379.984 110.363,379.984 111.379,378.968 111.379,372.618 112.141,371.856 121.539,371.856 121.92,372.237 121.92,379.857 121.666,380.111 117.526,380.111 117.399,379.984
  Bottom Layer w0.5: v1(68.707,387.985) 73.406,387.985 78.486,393.065 v1(81.153,393.065) ; v1(72.263,407.035) v1(72.263,410.591) ; v1(80.137,396.494) 80.264,396.367 83.947,396.367 86.995,393.319 86.995,383.159 89.154,381 97.409,381 98.552,382.143 98.552,384.429 95.758,387.223 95.758,398.145 96.139,398.526 v1@99.441,398.526 ; v1(92.837,407.035) 92.837,406.908 94.361,405.384 v1(96.647,405.384) ; v1(101.854,419.989) R300.1@101.854,422.172 ; v1(120.777,422.656) 133.985,422.656 135.89,424.561 v1(142.748,424.561) 152.781,424.561 153.416,425.196 v1(153.416,429.514) 153.924,430.022 v1(181.737,430.022)
  Bottom Layer w1: L500.1@53.723,429.821 53.723,430.782 53.067,431.438 C511.2@53.067,433.504 53.948,434.385 53.948,436.869 DC501.14@54.039,436.96 54.039,438.675 55.165,439.801 60.071,439.801 63.246,436.626 C509.1@63.5,436.626 ; v1(72.771,433.832) 76.708,433.832 v1(78.105,432.435)
+5V_DRV: C422.2 C424.2 C426.2 C428.2 C430.2 C432.2 C438.2 C517.1 C518.2 IC400.14 R411.2 R412.2 R415.2 R419.2 R422.2 R426.2 R429.2 R433.2 R504.1 U404.8 U405.8 U407.8 U408.8 U409.8 U410.8 U500.1 U500.2 | length 247.5
  Top Layer w0.5: v1(135.89,451.739) 135.91,451.719 R415.2@135.91,449.768 135.91,448.417 136.14,448.187 U404.8@136.14,446.853 ; C422.2@141.855,449.998 144.57,449.998 R419.2@144.8,449.768 ; v1(144.78,451.739) 144.798,451.739 144.8,451.737 R419.2@144.8,449.768 ; U405.8@145.03,446.853 145.03,447.806 144.8,448.036 R419.2@144.8,449.768 ; C424.2@150.745,449.998 153.46,449.998 R422.2@153.69,449.768 ; v1(153.67,451.612) 153.679,451.612 153.69,451.601 R422.2@153.69,449.768 ; U407.8@153.92,446.853 153.92,448.187 153.69,448.417 R422.2@153.69,449.768 ; C426.2@159.635,449.998 162.35,449.998 R426.2@162.58,449.768 ; v1(162.179,456.184) 164.314,456.184 C438.2@164.338,456.208 ; v1@162.58,451.592 R426.2@162.58,449.768 ; U408.8@162.81,446.853 162.81,448.06 162.58,448.29 R426.2@162.58,449.768 ; v1(168.402,451.485) 168.529,451.358 168.529,450.002 C428.2@168.525,449.998 171.24,449.998 R429.2@171.47,449.768 171.47,448.544 171.7,448.314 U409.8@171.7,446.853 ; IC400.14@174.244,454.914 181.356,454.914 ; v1@177.415,451.481 C430.2@177.415,449.998 180.13,449.998 R433.2@180.36,449.768 180.36,448.544 180.717,448.187 U410.8@180.717,446.98 ; v1(181.356,456.311) 181.356,454.914 ; R412.2@190.287,453.286 190.057,453.056 R411.2@190.057,449.96 190.019,449.998 C432.2@186.305,449.998 186.305,453.648 185.039,454.914 181.356,454.914
  Top Layer w1: C517.1@73.279,466.471 73.279,464.712 74.012,463.979 R504.1@79.883,463.979 ; v1(98.806,473.71) 102.489,470.027 102.489,460.248 103.505,459.232 122.555,459.232 130.048,451.739 v1(135.89,451.739)
  Bottom Layer w0.5: v1(135.89,451.739) v1(144.78,451.739) 153.67,451.739 153.924,451.485 v1(168.402,451.485) v1(177.419,451.485) 186.182,451.485 v1(186.309,451.612) ; v1(162.179,456.184) 163.195,455.168 180.34,455.168 181.356,456.184 v1(181.356,456.311)
  Bottom Layer w1: C518.2@62.925,473.656 62.925,472.119 62.484,471.678 U500.2@62.484,470.154 U500.1@65.024,470.154 65.024,468.757 67.31,466.471 C517.1@73.279,466.471 76.962,466.471 82.423,471.932 97.028,471.932 v1(98.806,473.71)
  other v1: 162.56,451.612
+15V_ANA: C500.1 C501.2 DC500.14 IC600.4 LEM600.4 LEM601.4 LEM602.4 R500.2 R602.2 | length 311.2
  Top Layer w0.35: R602.2@134.987,394.788 134.987,392.825 135.509,392.303 140.97,392.303 141.478,392.811 v1(141.478,393.7) ; v1(143.764,381.762) 144.145,382.143 IC600.4@144.145,383.999
  Top Layer w1: C500.1@63.124,413.89 63.124,415.422 64.643,416.941 69.519,416.941 R500.2@69.617,416.843 69.617,418.613 76.2,425.196 76.2,437.388 83.439,444.627 98.679,444.627 100.711,446.659 112.268,446.659 114.554,444.373 LEM600.4@114.554,442.722
  Bottom Layer w0.35: v1(141.478,393.7) 141.478,382.524 142.24,381.762 v1(143.764,381.762) 190.754,381.762 191.829,382.837 LEM601.4@191.829,385.831
  Bottom Layer w1: C501.2@53.194,409.882 53.194,410.112 54.039,410.957 DC500.14@54.039,413.25 54.039,414.965 54.872,415.798 59.182,415.798 61.09,413.89 C500.1@63.124,413.89 ; LEM600.4@114.554,442.722 114.554,434.086 116.84,431.8 193.421,431.8 195.199,430.022 195.199,412.75 ; LEM601.4@191.829,385.831 194.315,385.831 195.199,386.715 195.199,412.75 ; LEM602.4@191.829,412.755 191.834,412.75 195.199,412.75
+15V_DRV: C416.2 C417.2 C418.2 C513.1 C515.2 C516.2 DC502.14 IPM400.3 IPM400.7 IPM400.11 IPM400.14 R402.2 R404.2 R405.2 R503.1 U500.9 | length 254.4
  Top Layer w0.5: C418.2@159.512,484.1 C418.2@159.639,484.1 ; C418.2@159.639,483.87 C418.2@159.639,484.1 ; R402.2@161.798,490.45 160.377,490.45 159.639,489.712 C418.2@159.639,484.1 ; C417.2@162.536,473.456 162.56,473.48 162.56,474.98 162.052,475.488 IPM400.11@162.052,477.012 162.179,477.139 163.703,477.139 164.592,478.028 164.592,483.235 163.727,484.1 C416.2@162.052,484.1 C418.2@159.639,484.1 ; IPM400.7@182.372,477.012 184.277,477.012 185.039,477.774 R404.2@185.039,481.354 ; IPM400.3@202.692,477.012 205.232,477.012 206.248,478.028 R405.2@206.248,480.846
  Top Layer w1: U500.9@44.704,470.154 44.704,462.915 45.72,461.899 63.754,461.899 65.024,460.629 DC502.14@65.024,458.47 65.024,455.676 65.913,454.787 69.215,454.787 70.739,454.787 ; R503.1@72.009,446.865 72.009,449.326 70.739,450.596 70.739,454.787 ; C513.1@74.549,457.299 73.251,457.299 70.739,454.787
  Bottom Layer w1: U500.9@44.704,470.154 44.704,465.709 45.862,464.551 C516.2@49.511,464.551 ; C515.2@63.921,454.906 64.802,455.787 64.802,458.248 DC502.14@65.024,458.47
  Bottom Layer w1.25: C513.1@74.549,457.299 74.549,458.978 84.455,468.884 98.552,468.884 105.664,475.996 128.524,475.996 130.302,474.218 154.305,474.218 ; IPM400.14@154.432,477.012 154.305,476.885 154.305,474.218 ; IPM400.11@162.052,477.012 162.052,474.345 ; IPM400.7@182.372,477.012 182.372,474.345 ; IPM400.3@202.692,477.012 202.692,474.345 182.372,474.345 ; 154.305,474.218 162.179,474.218 162.052,474.345 ; 162.052,474.345 182.372,474.345